# Altium PCB EasyEDA_ZX64_rev0.pcbdoc (part 1 of 3)
Units mil, origin at the board's own origin, x right, y up, seen from the top; angles counter-clockwise.
Board outline 12792.03 x 5307.23 mil, 2 copper layers (Top Layer, Bottom Layer); 152 components, 165 nets, 989 pads, 228 vias.
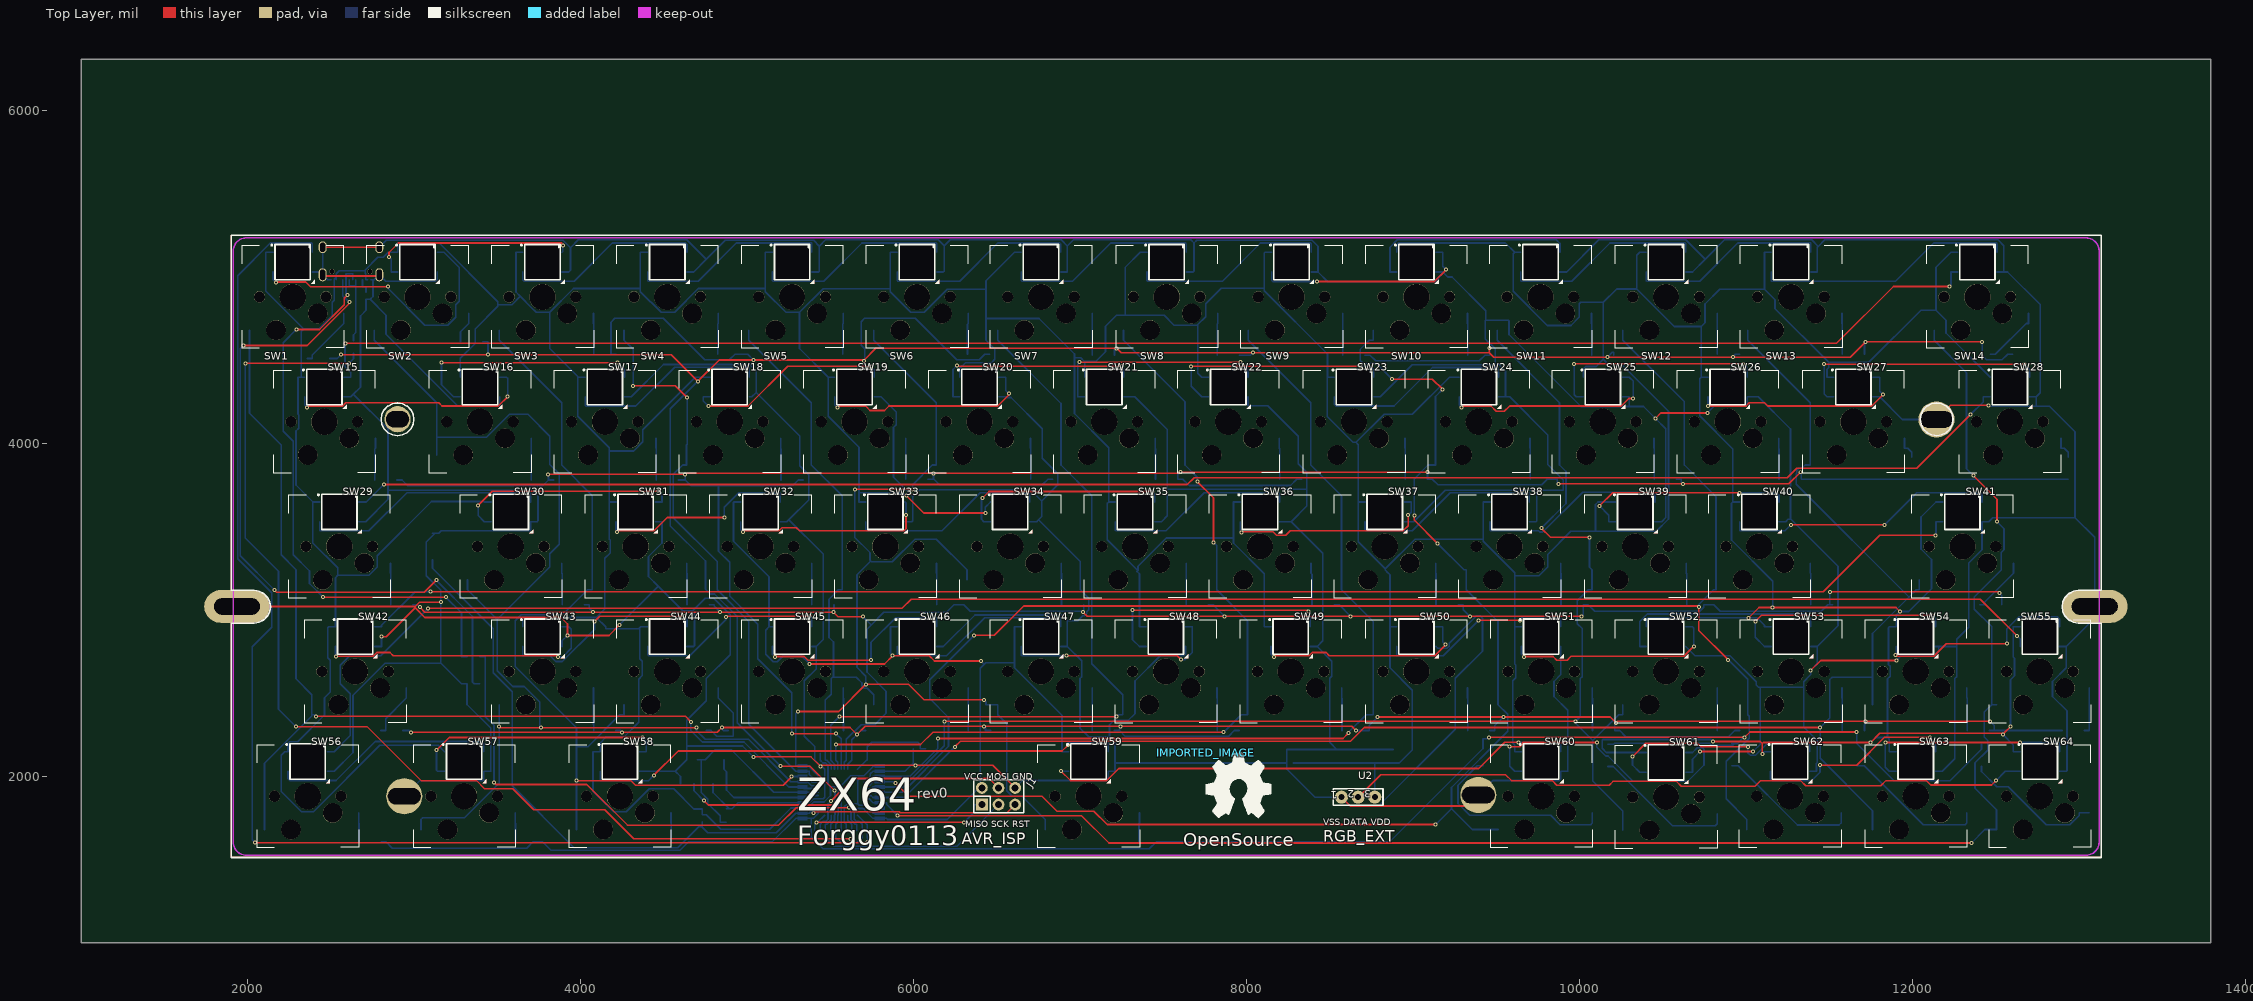
[diagram p0: Top Layer view]
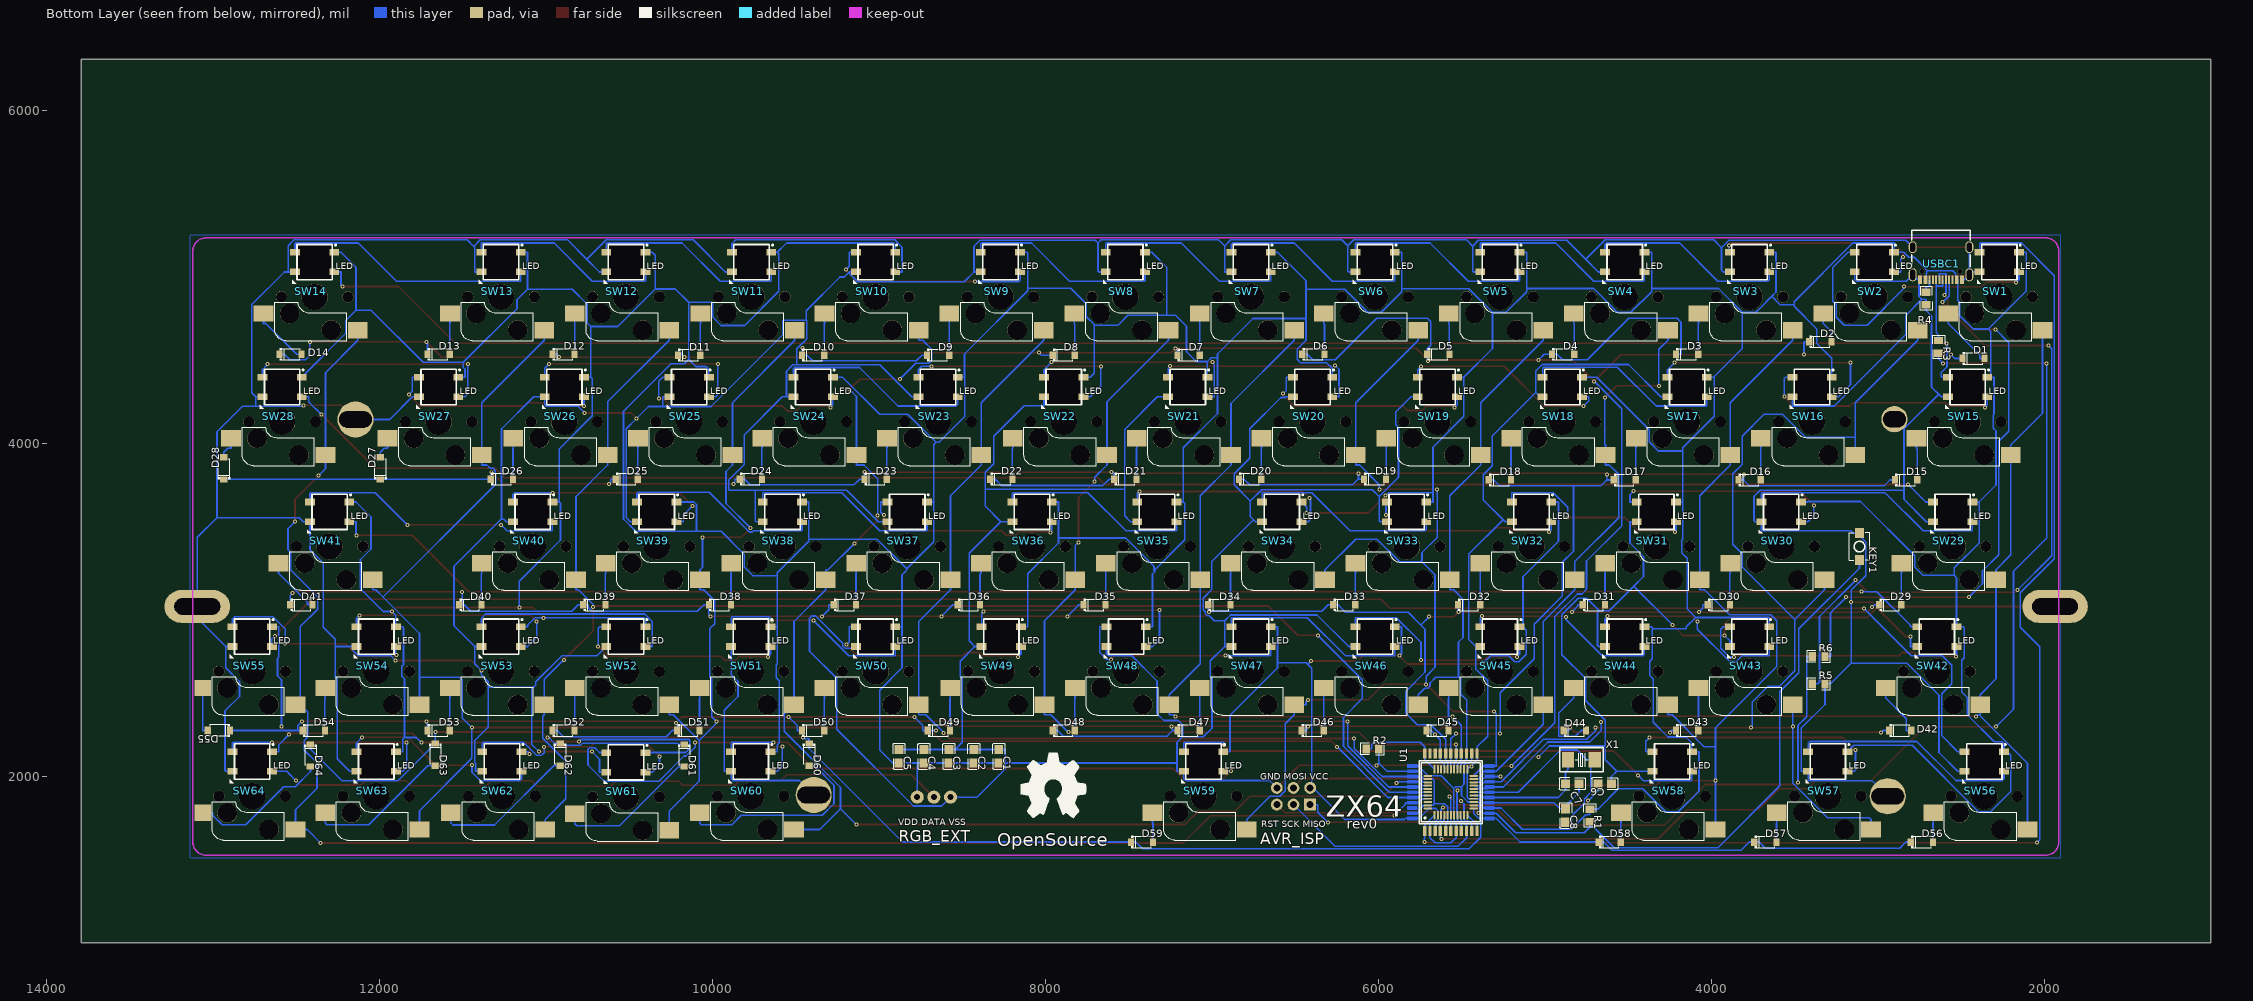
[diagram p1: Bottom Layer view, seen from below]

## Layer stack, top to bottom
Top Layer: signal copper (thickness not stored)
Dielectric: dielectric 12.6, FR-4, Dk 4.8
Bottom Layer: signal copper (thickness not stored)

## Board outline
13792.03,1000 1000,1000 1000,6307.23 13792.03,6307.23

## Components (designator, comment, footprint, x,y, rotation, side; value= is the part's Value field where it differs from the comment)
C1 "100uF" C0805 8280.18,2120 r90 bottom
C2 "100uF" C0805 8430.18,2120 r90 bottom
C3 "100uF" C0805 8580.18,2120 r90 bottom
C4 "100uF" C0805 8730.18,2120 r90 bottom
C5 "470uF" C0805 8880.18,2120 r90 bottom
C6 "1uF" C0805 4640.18,1955 r180 bottom
C7 "20pF" C0805 4835.18,1955 r180 bottom
C8 "20pF" C0805 4875.18,1765 r90 bottom
D1 "1N4148W-C84367" SOD-123_L2.8-W1.8-LS3.7-RD 2425.18,4510 r0 bottom
D2 "1N4148W-C84367" SOD-123_L2.8-W1.8-LS3.7-RD 3345.18,4610 r0 bottom
D3 "1N4148W-C84367" SOD-123_L2.8-W1.8-LS3.7-RD 4145.18,4535 r0 bottom
D4 "1N4148W-C84367" SOD-123_L2.8-W1.8-LS3.7-RD 4890.18,4535 r0 bottom
D5 "1N4148W-C84367" SOD-123_L2.8-W1.8-LS3.7-RD 5640.18,4535 r0 bottom
D6 "1N4148W-C84367" SOD-123_L2.8-W1.8-LS3.7-RD 6390.18,4535 r0 bottom
D7 "1N4148W-C84367" SOD-123_L2.8-W1.8-LS3.7-RD 7140.18,4530 r0 bottom
D8 "1N4148W-C84367" SOD-123_L2.8-W1.8-LS3.7-RD 7890.18,4530 r0 bottom
D9 "1N4148W-C84367" SOD-123_L2.8-W1.8-LS3.7-RD 8645.18,4530 r0 bottom
D10 "1N4148W-C84367" SOD-123_L2.8-W1.8-LS3.7-RD 9395.18,4530 r0 bottom
D11 "1N4148W-C84367" SOD-123_L2.8-W1.8-LS3.7-RD 10140.18,4530 r0 bottom
D12 "1N4148W-C84367" SOD-123_L2.8-W1.8-LS3.7-RD 10895.18,4535 r0 bottom
D13 "1N4148W-C84367" SOD-123_L2.8-W1.8-LS3.7-RD 11645.18,4535 r0 bottom
D14 "1N4148W-C84367" SOD-123_L2.8-W1.8-LS3.7-RD 12535.18,4535 r0 bottom
D15 "1N4148W-C84367" SOD-123_L2.8-W1.8-LS3.7-RD 2830.18,3780 r0 bottom
D16 "1N4148W-C84367" SOD-123_L2.8-W1.8-LS3.7-RD 3770.18,3780 r0 bottom
D17 "1N4148W-C84367" SOD-123_L2.8-W1.8-LS3.7-RD 4520.18,3780 r0 bottom
D18 "1N4148W-C84367" SOD-123_L2.8-W1.8-LS3.7-RD 5270.18,3780 r0 bottom
D19 "1N4148W-C84367" SOD-123_L2.8-W1.8-LS3.7-RD 6020.18,3785 r0 bottom
D20 "1N4148W-C84367" SOD-123_L2.8-W1.8-LS3.7-RD 6770.18,3785 r0 bottom
D21 "1N4148W-C84367" SOD-123_L2.8-W1.8-LS3.7-RD 7520.18,3785 r0 bottom
D22 "1N4148W-C84367" SOD-123_L2.8-W1.8-LS3.7-RD 8265.18,3785 r0 bottom
D23 "1N4148W-C84367" SOD-123_L2.8-W1.8-LS3.7-RD 9020.18,3785 r0 bottom
D24 "1N4148W-C84367" SOD-123_L2.8-W1.8-LS3.7-RD 9770.18,3785 r0 bottom
D25 "1N4148W-C84367" SOD-123_L2.8-W1.8-LS3.7-RD 10515.18,3785 r0 bottom
D26 "1N4148W-C84367" SOD-123_L2.8-W1.8-LS3.7-RD 11265.18,3785 r0 bottom
D27 "1N4148W-C84367" SOD-123_L2.8-W1.8-LS3.7-RD 11995.18,3850 r270 bottom
D28 "1N4148W-C84367" SOD-123_L2.8-W1.8-LS3.7-RD 12935.18,3850 r270 bottom
D29 "1N4148W-C84367" SOD-123_L2.8-W1.8-LS3.7-RD 2925.18,3030 r0 bottom
D30 "1N4148W-C84367" SOD-123_L2.8-W1.8-LS3.7-RD 3955.18,3030 r0 bottom
D31 "1N4148W-C84367" SOD-123_L2.8-W1.8-LS3.7-RD 4705.18,3030 r0 bottom
D32 "1N4148W-C84367" SOD-123_L2.8-W1.8-LS3.7-RD 5455.18,3030 r0 bottom
D33 "1N4148W-C84367" SOD-123_L2.8-W1.8-LS3.7-RD 6205.18,3030 r0 bottom
D34 "1N4148W-C84367" SOD-123_L2.8-W1.8-LS3.7-RD 6955.18,3030 r0 bottom
D35 "1N4148W-C84367" SOD-123_L2.8-W1.8-LS3.7-RD 7705.18,3030 r0 bottom
D36 "1N4148W-C84367" SOD-123_L2.8-W1.8-LS3.7-RD 8460.18,3030 r0 bottom
D37 "1N4148W-C84367" SOD-123_L2.8-W1.8-LS3.7-RD 9205.18,3030 r0 bottom
D38 "1N4148W-C84367" SOD-123_L2.8-W1.8-LS3.7-RD 9955.18,3030 r0 bottom
D39 "1N4148W-C84367" SOD-123_L2.8-W1.8-LS3.7-RD 10710.18,3030 r0 bottom
D40 "1N4148W-C84367" SOD-123_L2.8-W1.8-LS3.7-RD 11455.18,3030 r0 bottom
D41 "1N4148W-C84367" SOD-123_L2.8-W1.8-LS3.7-RD 12470.18,3030 r0 bottom
D42 "1N4148W-C84367" SOD-123_L2.8-W1.8-LS3.7-RD 2865.18,2275 r0 bottom
D43 "1N4148W-C84367" SOD-123_L2.8-W1.8-LS3.7-RD 4145.18,2275 r0 bottom
D44 "1N4148W-C84367" SOD-123_L2.8-W1.8-LS3.7-RD 4820.18,2275 r0 bottom
D45 "1N4148W-C84367" SOD-123_L2.8-W1.8-LS3.7-RD 5645.18,2275 r0 bottom
D46 "1N4148W-C84367" SOD-123_L2.8-W1.8-LS3.7-RD 6395.18,2275 r0 bottom
D47 "1N4148W-C84367" SOD-123_L2.8-W1.8-LS3.7-RD 7140.18,2275 r0 bottom
D48 "1N4148W-C84367" SOD-123_L2.8-W1.8-LS3.7-RD 7890.18,2275 r0 bottom
D49 "1N4148W-C84367" SOD-123_L2.8-W1.8-LS3.7-RD 8640.18,2275 r0 bottom
D50 "1N4148W-C84367" SOD-123_L2.8-W1.8-LS3.7-RD 9395.18,2275 r0 bottom
D51 "1N4148W-C84367" SOD-123_L2.8-W1.8-LS3.7-RD 10145.18,2275 r0 bottom
D52 "1N4148W-C84367" SOD-123_L2.8-W1.8-LS3.7-RD 10895.18,2275 r0 bottom
D53 "1N4148W-C84367" SOD-123_L2.8-W1.8-LS3.7-RD 11645.18,2275 r0 bottom
D54 "1N4148W-C84367" SOD-123_L2.8-W1.8-LS3.7-RD 12395.18,2275 r0 bottom
D55 "1N4148W-C84367" SOD-123_L2.8-W1.8-LS3.7-RD 12965.18,2275 r180 bottom
D56 "1N4148W-C84367" SOD-123_L2.8-W1.8-LS3.7-RD 2735.18,1605 r0 bottom
D57 "1N4148W-C84367" SOD-123_L2.8-W1.8-LS3.7-RD 3675.18,1605 r0 bottom
D58 "1N4148W-C84367" SOD-123_L2.8-W1.8-LS3.7-RD 4610.18,1605 r0 bottom
D59 "1N4148W-C84367" SOD-123_L2.8-W1.8-LS3.7-RD 7420.18,1605 r0 bottom
D60 "1N4148W-C84367" SOD-123_L2.8-W1.8-LS3.7-RD 9420.18,2130 r90 bottom
D61 "1N4148W-C84367" SOD-123_L2.8-W1.8-LS3.7-RD 10170.18,2125 r90 bottom
D62 "1N4148W-C84367" SOD-123_L2.8-W1.8-LS3.7-RD 10915.18,2130 r90 bottom
D63 "1N4148W-C84367" SOD-123_L2.8-W1.8-LS3.7-RD 11665.18,2130 r90 bottom
D64 "1N4148W-C84367" SOD-123_L2.8-W1.8-LS3.7-RD 12415.18,2125 r90 bottom
IMPORTED_IMAGE "IMPORTED_IMAGE" IMPORTED_IMAGE 7756.27,2141.86 r0 top
IMPORTED_IMAGE "IMPORTED_IMAGE" IMPORTED_IMAGE 7755.48,2141.86 r0 top
J1 "ISP разъем" HDR-TH_6P-P2.54-V-R2-C3-S2.54 6510.18,1880 r0 top
KEY1 "Switch3x4x2" SW-SMD_L4.0-W2.9-LS5.0 3110.18,3380 r90 bottom
R1 "10K" R0805 4730.18,1765 r90 bottom
R2 "10K" R0805 6035.18,2165 r0 bottom
R3 "22R" R0805 2635.18,4580 r90 bottom
R4 "5.1K" R0805 2710.18,4870 r270 bottom
R5 "5.1K" R0805 3355.18,2555 r0 bottom
R6 "22R" R0805 3355.18,2720 r0 bottom
SW1 "MX HOTSWAP 3228 TEST V1" "MX KAILH ROTATED"#1 2270.18,4880 r0 top
SW2 "MX HOTSWAP 3228 TEST V1" "MX KAILH ROTATED"#1 3020.18,4880 r0 top
SW3 "MX HOTSWAP 3228 TEST V1" "MX KAILH ROTATED"#1 3770.18,4880 r0 top
SW4 "MX HOTSWAP 3228 TEST V1" "MX KAILH ROTATED"#1 4520.18,4880 r0 top
SW5 "MX HOTSWAP 3228 TEST V1" "MX KAILH ROTATED"#1 5270.18,4880 r0 top
SW6 "MX HOTSWAP 3228 TEST V1" "MX KAILH ROTATED"#1 6020.18,4880 r0 top
SW7 "MX HOTSWAP 3228 TEST V1" "MX KAILH ROTATED"#1 6765.18,4880 r0 top
SW8 "MX HOTSWAP 3228 TEST V1" "MX KAILH ROTATED"#1 7520.18,4880 r0 top
SW9 "MX HOTSWAP 3228 TEST V1" "MX KAILH ROTATED"#1 8270.18,4880 r0 top
SW10 "MX HOTSWAP 3228 TEST V1" "MX KAILH ROTATED"#1 9020.18,4880 r0 top
SW11 "MX HOTSWAP 3228 TEST V1" "MX KAILH ROTATED"#1 9765.18,4880 r0 top
SW12 "MX HOTSWAP 3228 TEST V1" "MX KAILH ROTATED"#1 10520.18,4880 r0 top
SW13 "MX HOTSWAP 3228 TEST V1" "MX KAILH ROTATED"#1 11270.18,4880 r0 top
SW14 "MX HOTSWAP 3228 TEST V1" "MX KAILH ROTATED"#1 12390.18,4880 r0 top
SW15 "MX HOTSWAP 3228 TEST V1" "MX KAILH ROTATED"#1 2460.18,4130 r0 top
SW16 "MX HOTSWAP 3228 TEST V1" "MX KAILH ROTATED"#1 3395.18,4130 r0 top
SW17 "MX HOTSWAP 3228 TEST V1" "MX KAILH ROTATED"#1 4145.18,4130 r0 top
SW18 "MX HOTSWAP 3228 TEST V1" "MX KAILH ROTATED"#1 4895.18,4130 r0 top
SW19 "MX HOTSWAP 3228 TEST V1" "MX KAILH ROTATED"#1 5645.18,4130 r0 top
SW20 "MX HOTSWAP 3228 TEST V1" "MX KAILH ROTATED"#1 6395.18,4130 r0 top
SW21 "MX HOTSWAP 3228 TEST V1" "MX KAILH ROTATED"#1 7145.18,4130 r0 top
SW22 "MX HOTSWAP 3228 TEST V1" "MX KAILH ROTATED"#1 7890.18,4130 r0 top
SW23 "MX HOTSWAP 3228 TEST V1" "MX KAILH ROTATED"#1 8645.18,4130 r0 top
SW24 "MX HOTSWAP 3228 TEST V1" "MX KAILH ROTATED"#1 9395.18,4130 r0 top
SW25 "MX HOTSWAP 3228 TEST V1" "MX KAILH ROTATED"#1 10140.18,4130 r0 top
SW26 "MX HOTSWAP 3228 TEST V1" "MX KAILH ROTATED"#1 10890.18,4130 r0 top
SW27 "MX HOTSWAP 3228 TEST V1" "MX KAILH ROTATED"#1 11645.18,4130 r0 top
SW28 "MX HOTSWAP 3228 TEST V1" "MX KAILH ROTATED"#1 12585.18,4130 r0 top
SW29 "MX HOTSWAP 3228 TEST V1" "MX KAILH ROTATED"#1 2550.18,3380 r0 top
SW30 "MX HOTSWAP 3228 TEST V1" "MX KAILH ROTATED"#1 3580.18,3380 r0 top
SW31 "MX HOTSWAP 3228 TEST V1" "MX KAILH ROTATED"#1 4330.18,3380 r0 top
SW32 "MX HOTSWAP 3228 TEST V1" "MX KAILH ROTATED"#1 5080.18,3380 r0 top
SW33 "MX HOTSWAP 3228 TEST V1" "MX KAILH ROTATED"#1 5830.18,3380 r0 top
SW34 "MX HOTSWAP 3228 TEST V1" "MX KAILH ROTATED"#1 6580.18,3380 r0 top
SW35 "MX HOTSWAP 3228 TEST V1" "MX KAILH ROTATED"#1 7330.18,3380 r0 top
SW36 "MX HOTSWAP 3228 TEST V1" "MX KAILH ROTATED"#1 8080.18,3380 r0 top
SW37 "MX HOTSWAP 3228 TEST V1" "MX KAILH ROTATED"#1 8830.18,3380 r0 top
SW38 "MX HOTSWAP 3228 TEST V1" "MX KAILH ROTATED"#1 9580.18,3380 r0 top
SW39 "MX HOTSWAP 3228 TEST V1" "MX KAILH ROTATED"#1 10335.18,3380 r0 top
SW40 "MX HOTSWAP 3228 TEST V1" "MX KAILH ROTATED"#1 11080.18,3380 r0 top
SW41 "MX HOTSWAP 3228 TEST V1" "MX KAILH ROTATED"#1 12300.18,3380 r0 top
SW42 "MX HOTSWAP 3228 TEST V1" "MX KAILH ROTATED"#1 2645.18,2630 r0 top
SW43 "MX HOTSWAP 3228 TEST V1" "MX KAILH ROTATED"#1 3770.18,2630 r0 top
SW44 "MX HOTSWAP 3228 TEST V1" "MX KAILH ROTATED"#1 4520.18,2630 r0 top
SW45 "MX HOTSWAP 3228 TEST V1" "MX KAILH ROTATED"#1 5270.18,2630 r0 top
SW46 "MX HOTSWAP 3228 TEST V1" "MX KAILH ROTATED"#1 6020.18,2630 r0 top
SW47 "MX HOTSWAP 3228 TEST V1" "MX KAILH ROTATED"#1 6765.18,2630 r0 top
SW48 "MX HOTSWAP 3228 TEST V1" "MX KAILH ROTATED"#1 7515.18,2630 r0 top
SW49 "MX HOTSWAP 3228 TEST V1" "MX KAILH ROTATED"#1 8265.18,2630 r0 top
SW50 "MX HOTSWAP 3228 TEST V1" "MX KAILH ROTATED"#1 9020.18,2630 r0 top
SW51 "MX HOTSWAP 3228 TEST V1" "MX KAILH ROTATED"#1 9770.18,2630 r0 top
SW52 "MX HOTSWAP 3228 TEST V1" "MX KAILH ROTATED"#1 10520.18,2630 r0 top
SW53 "MX HOTSWAP 3228 TEST V1" "MX KAILH ROTATED"#1 11270.18,2630 r0 top
SW54 "MX HOTSWAP 3228 TEST V1" "MX KAILH ROTATED"#1 12020.18,2630 r0 top
SW55 "MX HOTSWAP 3228 TEST V1" "MX KAILH ROTATED"#2 12765.18,2630 r0 top
SW56 "MX HOTSWAP 3228 TEST V1" "MX KAILH ROTATED"#1 2360.18,1880 r0 top
SW57 "MX HOTSWAP 3228 TEST V1" "MX KAILH ROTATED"#1 3300.18,1880 r0 top
SW58 "MX HOTSWAP 3228 TEST V1" "MX KAILH ROTATED"#1 4235.18,1880 r0 top
SW59 "MX HOTSWAP 3228 TEST V1" "MX KAILH ROTATED"#1 7050.18,1880 r0 top
SW60 "MX HOTSWAP 3228 TEST V1" "MX KAILH ROTATED"#1 9770.18,1880 r0 top
SW61 "MX HOTSWAP 3228 TEST V1" "MX KAILH ROTATED"#1 10520.18,1875 r0 top
SW62 "MX HOTSWAP 3228 TEST V1" "MX KAILH ROTATED"#1 11265.18,1880 r0 top
SW63 "MX HOTSWAP 3228 TEST V1" "MX KAILH ROTATED"#1 12020.18,1880 r0 top
SW64 "MX HOTSWAP 3228 TEST V1" "MX KAILH ROTATED"#2 12765.18,1880 r0 top
U1 "atmega32u4-au&mu" ATMEGA32U4-AU&MU 5565.18,1905 r270 bottom
U2 "2.54_3PIN" "2.54 3PIN" 8720.18,1875 r0 top
USBC1 "TYPE-C-31-M-12" USB-C_SMD-TYPE-C-31-M-12 2620.18,5080 r180 bottom
X1 "16MHz" CRYSTAL-SMD_L5.0-W3.2-1 4780.18,2100 r0 bottom
? "" ? 1751.09,3380 r0 top
? "" ? 7515.33,5460.12 r0 top

## Footprints (in the part's own frame and the unit in brackets; to place one, negate y for a bottom-side part, rotate by r counter-clockwise, add the part's x,y. Pads: shape width x height; smd on the part's side, far side on the other; paste and mask are expansions set on the pad)
"2.54 3PIN" [mm]
  round 2 hole 0.914: 1(-3.81,0) 2(-1.27,0) 3(1.27,0)
  silkscreen extent -5.08,-1.27 2.54,1.27
ATMEGA32U4-AU&MU [mm]
  oval 1.3x0.3 smd: 1(3.513,-2.483) 2(3.513,-1.983) 3(3.513,-1.483) 4(3.513,-0.983) 5(3.513,-0.483) 6(3.513,0.017) 7(3.513,0.517) 8(3.513,1.017) 9(3.513,1.517) 10(3.513,2.017) 11(3.513,2.517) 23(-3.487,2.517) 24(-3.487,2.017) 25(-3.487,1.517) 26(-3.487,1.017) 27(-3.487,0.517) 28(-3.487,0.017) 29(-3.487,-0.483) 30(-3.487,-0.983) 31(-3.487,-1.483) 32(-3.487,-1.983) 33(-3.487,-2.483)
  rect 1.5x0.5 smd: 1(5.915,-3.985) 2(5.915,-3.185) 3(5.915,-2.385) 4(5.915,-1.585) 5(5.915,-0.785) 6(5.915,0.015) 7(5.915,0.815) 8(5.915,1.615) 9(5.915,2.415) 10(5.915,3.215) 11(5.915,4.015) 23(-5.885,4.015) 24(-5.885,3.215) 25(-5.885,2.415) 26(-5.885,1.615) 27(-5.885,0.815) 28(-5.885,0.015) 29(-5.885,-0.785) 30(-5.885,-1.585) 31(-5.885,-2.385) 32(-5.885,-3.185) 33(-5.885,-3.985)
  oval 0.3x1.3 smd: 12(2.513,3.517) 13(2.013,3.517) 14(1.513,3.517) 15(1.013,3.517) 16(0.513,3.517) 17(0.013,3.517) 18(-0.487,3.517) 19(-0.987,3.517) 20(-1.487,3.517) 21(-1.987,3.517) 22(-2.487,3.517) 34(-2.487,-3.483) 35(-1.987,-3.483) 36(-1.487,-3.483) 37(-0.987,-3.483) 38(-0.487,-3.483) 39(0.013,-3.483) 40(0.513,-3.483) 41(1.013,-3.483) 42(1.513,-3.483) 43(2.013,-3.483) 44(2.513,-3.483)
  round 0 smd: 12(4.015,5.915) 13(3.215,5.915) 14(2.415,5.915) 15(1.615,5.915) 16(0.815,5.915) 17(0.015,5.915) 18(-0.785,5.915) 19(-1.585,5.915) 20(-2.385,5.915) 21(-3.185,5.915) 22(-3.985,5.915) 34(-3.985,-5.885) 35(-3.185,-5.885) 36(-2.385,-5.885) 37(-1.585,-5.885) 38(-0.785,-5.885) 39(0.015,-5.885) 40(0.815,-5.885) 41(1.615,-5.885) 42(2.415,-5.885) 43(3.215,-5.885) 44(4.015,-5.885)
  Top Layer region: 4.265,5.165 3.765,5.165 3.765,6.665 4.265,6.665
  Top Layer region: 3.465,5.165 2.965,5.165 2.965,6.665 3.465,6.665
  Top Layer region: 2.665,5.165 2.165,5.165 2.165,6.665 2.665,6.665
  Top Layer region: 1.865,5.165 1.365,5.165 1.365,6.665 1.865,6.665
  Top Layer region: 1.065,5.165 0.565,5.165 0.565,6.665 1.065,6.665
  Top Layer region: 0.265,5.165 -0.235,5.165 -0.235,6.665 0.265,6.665
  Top Layer region: -0.535,5.165 -1.035,5.165 -1.035,6.665 -0.535,6.665
  Top Layer region: -1.335,5.165 -1.835,5.165 -1.835,6.665 -1.335,6.665
  Top Layer region: -2.135,5.165 -2.635,5.165 -2.635,6.665 -2.135,6.665
  Top Layer region: -2.935,5.165 -3.435,5.165 -3.435,6.665 -2.935,6.665
  Top Layer region: -3.735,5.165 -4.235,5.165 -4.235,6.665 -3.735,6.665
  Top Layer region: -3.735,-6.635 -4.235,-6.635 -4.235,-5.135 -3.735,-5.135
  Top Layer region: -2.935,-6.635 -3.435,-6.635 -3.435,-5.135 -2.935,-5.135
  Top Layer region: -2.135,-6.635 -2.635,-6.635 -2.635,-5.135 -2.135,-5.135
  Top Layer region: -1.335,-6.635 -1.835,-6.635 -1.835,-5.135 -1.335,-5.135
  Top Layer region: -0.535,-6.635 -1.035,-6.635 -1.035,-5.135 -0.535,-5.135
  Top Layer region: 0.265,-6.635 -0.235,-6.635 -0.235,-5.135 0.265,-5.135
  Top Layer region: 1.065,-6.635 0.565,-6.635 0.565,-5.135 1.065,-5.135
  Top Layer region: 1.865,-6.635 1.365,-6.635 1.365,-5.135 1.865,-5.135
  Top Layer region: 2.665,-6.635 2.165,-6.635 2.165,-5.135 2.665,-5.135
  Top Layer region: 3.465,-6.635 2.965,-6.635 2.965,-5.135 3.465,-5.135
  Top Layer region: 4.265,-6.635 3.765,-6.635 3.765,-5.135 4.265,-5.135
  silkscreen extent -4.78,-4.78 4.82,4.82
C0805 [mm]
  rect 1.41x1.35 smd: 1(1.03,0) 2(-1.03,0)
  silkscreen extent -1.96,-0.9 1.96,0.9
CRYSTAL-SMD_L5.0-W3.2-1 [mm]
  rect 1.9x2.4 smd: 1(2.05,0) 2(-2.05,0)
  silkscreen extent -3.33,-1.85 3.32,1.85
HDR-TH_6P-P2.54-V-R2-C3-S2.54 [mm]
  rect 1.8x1.8 hole 1.05: 1(-2.54,-1.27)
  round 1.8 hole 1.05: 2(-2.54,1.27) 3(0,-1.27) 4(0,1.27) 5(2.54,-1.27) 6(2.54,1.27)
  silkscreen extent -3.81,-2.54 3.81,2.54
IMPORTED_IMAGE [mil]
"MX KAILH ROTATED"#1 [mm]
  rect 3x2.5 smd far side: 1(-6.599,-5.08) 2(7.8,-2.54)
  rect 1.5x1 smd far side: 3(-3,6.8) 4(-3,3.8) 5(3,3.8) 6(3,6.8)
  round 1.702 hole 1.702 unplated: ""(-5.08,0) ""(5.08,0)
  round 3 hole 3 unplated: ""(-2.54,-5.08) ""(3.81,-2.54)
  round 3.988 hole 3.988 unplated: ""(0,0)
  Top Layer region: 2.8,2 3.4,2 3.4,2.6
  Multi-Layer board cut-out: -2.627,7.927 -2.627,2.673 2.627,2.673 2.627,7.927
  silkscreen extent -7.8,-7.8 7.8,8
"MX KAILH ROTATED"#2 [mm]
  rect 3x2.5 smd far side: 1(-6.599,-5.08)
  rect 2.5x2.5 smd far side: 2(7.543,-2.54)
  rect 1.5x1 smd far side: 3(-3,6.8) 4(-3,3.8) 5(3,3.8) 6(3,6.8)
  round 1.702 hole 1.702 unplated: ""(-5.08,0) ""(5.08,0)
  round 3 hole 3 unplated: ""(-2.54,-5.08) ""(3.81,-2.54)
  round 3.988 hole 3.988 unplated: ""(0,0)
  Top Layer region: 2.8,2 3.4,2 3.4,2.6
  Multi-Layer board cut-out: -2.627,7.927 -2.627,2.673 2.627,2.673 2.627,7.927
  silkscreen extent -7.8,-7.8 7.8,8
R0805 [mil]
  rect 44.59x54.21 smd: 1(38.04,0) 2(-38.04,0)
  silkscreen extent -69,-36 69,36
SOD-123_L2.8-W1.8-LS3.7-RD [mm]
  rect 0.95x1.15 smd: 1(1.693,0) 2(-1.693,0)
  silkscreen extent -1.41,-0.94 1.63,0.94
SW-SMD_L4.0-W2.9-LS5.0 [mm]
  rect 1.53x1.36 smd: 1(2.035,0) 2(-2.035,0)
  silkscreen extent -2.08,-1.58 2.08,1.58
USB-C_SMD-TYPE-C-31-M-12 [mm]
  oval 1.2x2 hole 0.8 slot 1.6 at 90 deg: 0(-4.325,-1.716) 0(4.325,-1.716)
  oval 1.2x1.8 hole 0.8 slot 1.4 at 90 deg: 0(-4.325,2.484) 0(4.325,2.484)
  rect 0.3x1.3 smd: A1(3.35,-2.484) A4(2.55,-2.484) A5(1.25,-2.484) A6(0.25,-2.484) A7(-0.25,-2.484) A8(-1.25,-2.484) A9(-2.55,-2.484) A12(-3.35,-2.484) B1(-3.05,-2.484) B4(-2.25,-2.484) B5(-1.75,-2.484) B6(-0.75,-2.484) B7(0.75,-2.484) B8(1.75,-2.484) B9(2.25,-2.484) B12(3.05,-2.484)
  round 0.75 hole 0.75 unplated: ""(-2.9,-1.216) ""(2.9,-1.216)
  silkscreen extent -4.47,-0.5 4.47,5.08
? [mil]

## Free pads (board coordinates)
  oval 393.7x196.85 hole 98.42 slot 275.59 at 0 deg: 1(1935.18,3020) 1(13095.18,3020)
  round 157.48 hole 98.42 slot 137.8 at 0 deg: 1(2900.18,4145)
  round 216.53 hole 98.42 slot 196.85 at 0 deg: 1(2940.28,1880) 1(9392.04,1887.88) 1(12144.98,4143.7)

## Via types
v1: diameter 24.02, hole 12.01, Top Layer to Bottom Layer, tented both sides, 228 vias

## Nets (pads, with @x,y where several pads share a name; then routed paths per layer and width w, separated by ;. In a path a pad name is that pad's centre, name@x,y a point inside that pad or via, vN(x,y) a via of type N, cw(c..) or ccw(c..) an arc to the next point about the centre after c; other vN are vias at no path point)
"\"\"D-\"\"":  | length 20.3
  Bottom Layer w10: 5659.07,1672.12 5659.07,1692.42
"\"D+\"": R3.2 U1.4 | length 6768.1
  Top Layer w10: v1(1986.03,4480.24) v1(2608.11,4480.24) ; v1(2288.69,2298.54) 2716.94,2298.54 3041.32,1974.16 3373.72,1974.16 3422.46,1925.42 3592.33,1925.42 3718.72,1799.03 4143.94,1799.03 4318.51,1624.46 v1(5619.46,1624.46)
  Bottom Layer w10: v1(1986.03,4480.24) 1986.03,3430.83 2184.3,3232.56 2184.3,2402.93 v1(2288.69,2298.54) ; v1(2608.11,4480.24) 2635.18,4507.31 R3.2@2635.18,4541.96 ; U1.4@5603.88,1766.7 5603.88,1736.42 5627.58,1712.72 U1.4@5627.58,1672.12 5627.58,1651.83 5627.58,1631.53 5626.53,1631.53 v1(5619.46,1624.46)
"\"D-\"": R6.1 U1.3 | length 3238.2
  Top Layer w10: v1(3479.09,1963.8) 3491.77,1951.12 4037.38,1951.12 4281.66,1706.84 5190.15,1706.84 5294.78,1811.47 v1(5612.99,1811.47)
  Bottom Layer w10: R6.1@3393.22,2720 3426.59,2720 3426.59,2358.24 3479.09,2305.74 v1(3479.09,1963.8) ; v1(5612.99,1811.47) 5623.56,1800.9 U1.3@5623.56,1766.7 ; U1.3@5623.56,1766.7 5623.58,1739.5 5629.08,1733.9 5650.38,1712.7 5659.08,1712.7 ; U1.3@5659.07,1692.42 5659.07,1712.72
COL0: SW1.1 SW15.1 SW29.1 SW42.1 SW56.1 U1.18 | length 6530.3
  Top Layer w10: v1(2409.69,2359.79) 4629.83,2359.79 v1(4662.03,2327.59)
  Bottom Layer w10: SW1.1@2010.38,4680 2010.38,4180.24 2200.38,3990.24 SW15.1@2200.38,3930 2200.38,3330.24 2290.38,3240.24 SW29.1@2290.38,3180 2290.38,2585.24 2385.38,2490.24 SW42.1@2385.38,2430 2385.38,2384.1 2385.38,2369.76 ; SW56.1@2100.38,1680 2100.38,2077.61 2385.38,2362.61 2385.38,2369.76 ; v1(2409.69,2359.79) 2399.72,2369.76 2385.38,2369.76 ; v1(4662.03,2327.59) 4662.03,2274.62 4731.18,2205.47 4981.24,2205.47 5250.81,1935.9 U1.18@5332.3,1935.9 5341.31,1926.89 5424,1926.89 U1.18@5426.71,1924.18
COL1: SW2.1 SW16.1 SW30.1 SW43.1 SW57.1 U1.19 | length 7251.2
  Top Layer w10: v1(3510.38,2298.15) 3516.72,2291.81 v1(3760.69,2291.81) v1(4696.27,2291.81)
  Bottom Layer w10: SW2.1@2760.38,4680 2760.38,4619.76 3135.38,4244.76 3135.38,4037.18 ; SW57.1@3040.38,1680 3040.38,1740.24 3051.84,1751.7 3302.05,1751.7 3510.38,1960.03 v1(3510.38,2298.15) SW43.1@3510.38,2430 ; SW16.1@3135.38,3930 3135.38,4037.18 ; SW30.1@3320.38,3180 3320.38,3119.76 3498.15,2942 ; v1(3760.69,2291.81) 3754.35,2298.15 3754.35,2445.85 3660.85,2539.35 3592.17,2539.35 3498.15,2633.37 3498.15,2941.99 ; v1(4696.27,2291.81) 4696.27,2273.65 4748.39,2221.53 5007.97,2221.53 5262.1,1967.4 U1.19@5332.3,1967.4 5362.55,1967.4 5386.09,1943.86 U1.19@5426.71,1943.86 ; 3135.38,4037.18 3434.63,4037.18 3572.73,4175.28 3683.2,4175.28 3815.06,4043.42 3815.06,3873.13 3870.53,3817.66 3870.53,3394.32 3813.46,3337.25 3813.46,3257.31 3498.15,2942
COL2: SW3.1 SW17.1 SW31.1 SW44.1 SW58.1 U1.20 | length 5663.4
  Top Layer w10: v1(3975.38,1974.2) 4300.88,1974.18 4329.1,1945.96 5215.97,1945.96 v1(5267.35,1997.34)
  Bottom Layer w10: SW3.1@3510.38,4680 3510.38,4619.76 3885.38,4244.76 SW17.1@3885.38,3930 3885.38,3899.88 3885.38,3869.76 4070.38,3684.76 SW31.1@4070.38,3180 4070.38,3119.76 4040.66,3119.76 3891.11,2970.21 3642.51,2970.21 3607.43,2935.13 3607.43,2659.16 3975.38,2291.21 3975.38,2178.03 ; SW58.1@3975.38,1680 3975.38,1740.24 v1(3975.38,1974.2) 3975.38,2178.03 ; SW44.1@4260.38,2430 4260.38,2369.76 4235.39,2369.76 4043.66,2178.03 3975.38,2178.03 ; v1(5267.35,1997.34) 5268.9,1998.89 U1.20@5332.3,1998.89 5356.43,1998.89 5391.77,1963.55 U1.20@5426.71,1963.55
COL3: SW4.1 SW18.1 SW32.1 SW45.1 U1.21 | length 3473.2
  Top Layer w10: v1(4315.14,4345.23) 4568.91,4345.23 v1(4639.97,4274.17)
  Bottom Layer w10: SW4.1@4260.38,4680 4260.38,4619.76 4315.14,4565 v1(4315.14,4345.23) ; v1(4639.97,4274.17) 4639.97,3994.83 4635.38,3990.24 SW18.1@4635.38,3930 4635.38,3869.76 4612.79,3869.76 4557.05,3814.02 4557.05,3553.81 4820.38,3290.48 SW32.1@4820.38,3180 4820.38,3149.88 4820.38,3119.76 5010.38,2929.76 SW45.1@5010.38,2430 5010.38,2311.8 5291.79,2030.39 U1.21@5332.3,2030.39 5352.56,2030.39 5372.82,2030.39 5372.89,2030.32 5372.89,2010.9 5400.56,1983.23 U1.21@5426.71,1983.23
COL4: SW5.1 SW19.1 SW33.1 SW46.1 U1.25 | length 3325.7
  Bottom Layer w10: SW5.1@5010.38,4680 5010.38,4619.76 5385.38,4244.76 SW19.1@5385.38,3930 5385.38,3899.88 5385.38,3869.76 5570.38,3684.76 SW33.1@5570.38,3180 5570.38,3119.76 5547.79,3119.76 5492.05,3064.02 5492.05,2833.58 5518.82,2806.81 5518.82,2595.21 ; U1.25@5505.45,2042.29 5505.45,2069.61 5478.88,2096.18 5470.1,2096.18 U1.25@5470.1,2136.69 5470.1,2458.48 5504.4,2492.78 5504.4,2587.18 5512.43,2595.21 5518.82,2595.21 ; SW46.1@5760.38,2430 5760.38,2490.24 5721.31,2529.31 5703.82,2529.31 5690.31,2542.82 5690.31,2560.31 5655.41,2595.21 5518.82,2595.21
COL5: SW6.1 SW20.1 SW34.1 SW47.1 SW59.1 U1.22 | length 6296.6
  Top Layer w10: v1@5306.19,2389.65 5550.65,2389.65 v1(5713.37,2552.37) 5969.36,2552.37 6062.15,2459.58 v1(6424.17,2459.58) ; v1@5647.25,3723.3 v1(5994.76,3723.3)
  Bottom Layer w10: v1@5306.19,2389.65 5291.79,2375.25 5291.79,2061.89 U1.22@5332.3,2061.89 5372.82,2061.89 5372.82,2056.81 U1.22@5426.71,2002.92 ; v1@5647.25,3723.3 5647.25,3434.87 5738.3,3343.82 5738.3,3298.45 5743.2,3293.56 ; v1(5713.37,2552.37) 5713.37,2601.5 5659.68,2655.19 5659.68,3210.04 5743.2,3293.56 ; SW6.1@5760.38,4680 5760.38,4619.76 6135.38,4244.76 SW20.1@6135.38,3930 6135.38,3869.76 6112.79,3869.76 5994.76,3751.73 v1(5994.76,3723.3) ; SW34.1@6320.38,3180 6320.38,3240.24 6136.06,3424.56 6007.85,3424.56 5871.95,3288.66 5748.09,3288.66 5743.2,3293.56 ; v1(6424.17,2459.58) 6435.34,2448.41 6435.34,2430 SW47.1@6505.38,2430 6505.38,2369.76 6560.21,2314.93 6560.21,1912.64 6592.87,1879.98 6650.64,1879.98 6790.38,1740.24 SW59.1@6790.38,1680
  other v1: 5306.19,2389.65 5647.25,3723.3
COL6: SW7.1 SW21.1 SW35.1 SW48.1 U1.26 | length 4674.6
  Top Layer w10: v1(5553.54,2357.98) v1(7218.32,2357.98)
  Bottom Layer w10: U1.26@5525.14,2042.29 5525.14,2072.63 5501.59,2096.18 5501.59,2116.44 U1.26@5501.59,2136.69 5501.59,2177.21 5501.59,2306.03 v1(5553.54,2357.98) ; SW7.1@6505.38,4680 6505.38,4619.76 6885.38,4239.76 SW21.1@6885.38,3930 6885.38,3869.76 7070.38,3684.76 SW35.1@7070.38,3180 7070.38,3149.88 7070.38,3119.76 7070.38,2675.24 7255.38,2490.24 SW48.1@7255.38,2430 7255.38,2369.76 7230.1,2369.76 v1(7218.32,2357.98)
COL7: SW8.1 SW22.1 SW36.1 SW49.1 U1.27 | length 5318.5
  Top Layer w10: v1(5533.09,2190.54) 6041.58,2190.54 6116.2,2265.16 v1(7862.94,2265.16) ; v1(7704.43,3769.5) 7801.47,3672.46 v1(7801.47,3405.75)
  Bottom Layer w10: v1(5533.09,2190.54) U1.27@5533.09,2136.69 5533.09,2116.44 5533.09,2096.18 5544.82,2084.45 U1.27@5544.82,2042.29 ; SW8.1@7260.38,4680 7260.38,4619.76 7630.38,4249.76 SW22.1@7630.38,3930 7630.38,3899.88 7630.38,3869.76 7704.43,3795.71 v1(7704.43,3769.5) ; v1(7801.47,3405.75) 7820.38,3386.84 SW36.1@7820.38,3180 7820.38,3154.36 7820.38,3119.76 8005.38,2934.76 8005.38,2490.24 SW49.1@8005.38,2430 8005.38,2369.76 7967.54,2369.76 v1(7862.94,2265.16)
COL8: SW9.1 SW23.1 SW37.1 SW50.1 U1.36 | length 5890
  Top Layer w10: v1(6145.1,2226.99) 8579.5,2226.99 v1(8611.66,2259.15)
  Bottom Layer w10: U1.36@5702.3,1963.55 5729.79,1963.55 5756.35,1990.11 5756.35,1998.89 5776.61,1998.89 U1.36@5796.87,1998.89 5977.22,1998.89 6145.1,2166.77 v1(6145.1,2226.99) ; SW9.1@8010.38,4680 8010.38,4619.76 8385.38,4244.76 SW23.1@8385.38,3930 8385.38,3899.88 8385.38,3869.76 8570.38,3684.76 SW37.1@8570.38,3180 8570.38,3119.76 8760.38,2929.76 SW50.1@8760.38,2430 8760.38,2400.57 8760.38,2369.76 8718.26,2369.76 8611.66,2263.16 v1(8611.66,2259.15)
COL9: SW10.1 SW24.1 SW38.1 SW51.1 SW60.1 U1.37 | length 7807.1
  Top Layer w10: v1@5890.03,1960.05 5970.08,1880 6771.54,1880 6861.1,1790.44 7082.41,1790.44 7162.98,1709.87 v1@9136.25,1709.87 ; v1(8874.38,4385.94) 9116.23,4385.94 v1(9177.96,4324.21) ; v1@9008.42,3567.05 9008.42,3537.65 v1(9146.21,3399.86)
  Bottom Layer w10: U1.37@5702.3,1943.86 5732.81,1943.86 5756.35,1967.4 5776.61,1967.4 U1.37@5796.87,1967.4 5882.68,1967.4 v1@5890.03,1960.05 ; SW10.1@8760.38,4680 8760.38,4619.76 8737.79,4619.76 8682.05,4564.02 8682.05,4499.21 8701.02,4480.24 8780.08,4480.24 v1(8874.38,4385.94) ; v1@9008.42,3567.05 9008.42,3787.98 9090.2,3869.76 9135.38,3869.76 SW24.1@9135.38,3930 9135.38,4281.63 v1(9177.96,4324.21) ; v1@9136.25,1709.87 9230.75,1804.37 ; v1(9146.21,3399.86) 9305.83,3240.24 9320.38,3240.24 SW38.1@9320.38,3180 9320.38,3149.88 9320.38,3119.76 9510.38,2929.76 SW51.1@9510.38,2430 9568.68,2371.7 9568.68,2270.63 9230.75,1932.7 9230.75,1804.37 ; SW60.1@9510.38,1680 9440.34,1680 9355.12,1680 9230.75,1804.37
  other v1: 9136.25,1709.87 5890.03,1960.05 9008.42,3567.05
COL10: SW11.1 SW25.1 SW39.1 SW52.1 SW61.1 U1.38 | length 8531.2
  Top Layer w10: v1(6184.48,2330.21) v1(9977.41,2330.21) ; v1(9770.63,3490.12) 9825.74,3435.01 v1(10060.44,3435.01)
  Bottom Layer w10: U1.38@5702.3,1924.18 5744.63,1924.18 5756.35,1935.9 U1.38@5796.87,1935.9 5937.8,1935.9 6184.48,2182.58 v1(6184.48,2330.21) ; SW11.1@9505.38,4680 9505.38,4619.76 9880.38,4244.76 SW25.1@9880.38,3930 9880.38,3869.76 9919.11,3831.03 9919.11,3638.6 v1(9770.63,3490.12) ; v1(10060.44,3435.01) 10060.44,3255.18 10075.38,3240.24 SW39.1@10075.38,3180 10075.38,3119.76 10052.79,3119.76 9987.47,3054.44 9987.47,2915.94 10015.87,2887.54 10015.87,2598.65 10004.4,2587.18 10004.4,2357.2 v1(9977.41,2330.21) 9977.41,2316.76 10079.68,2214.49 ; SW61.1@10260.38,1675 10260.38,1791.5 10079.68,1972.2 10079.68,2214.49 ; SW52.1@10260.38,2430 10260.38,2369.76 10234.95,2369.76 10079.68,2214.49
COL11: SW12.1 SW26.1 SW40.1 SW53.1 SW62.1 U1.39 | length 9394
  Top Layer w10: v1(6363.87,2846.77) 6484.33,2846.77 6660.72,3023.16 10711.59,3023.16 10717.3,3017.45 10717.3,2875.57 v1(10893.44,2699.43)
  Bottom Layer w10: U1.39@5702.3,1904.49 5702.38,1904.41 U1.39@5796.87,1904.41 5934.93,1904.41 6210.05,2179.53 6210.05,2353.63 6096.24,2467.44 6096.24,2579.14 v1(6363.87,2846.77) ; SW12.1@10260.38,4680 10260.38,4619.76 10630.38,4249.76 SW26.1@10630.38,3930 10630.38,3869.76 10820.38,3679.76 SW40.1@10820.38,3180 10820.38,3149.88 10820.38,3119.76 10804.74,3119.76 10717.3,3032.32 v1@10717.3,3017.45 ; v1(10893.44,2699.43) 11010.38,2582.49 SW53.1@11010.38,2430 11010.38,2369.76 11019.9,2360.24 11019.9,2228.98 10881.01,2090.09 10881.01,1864.61 11005.38,1740.24 SW62.1@11005.38,1680
  other v1: 10717.3,3017.45
COL12: SW13.1 SW27.1 SW41.1 SW54.1 SW63.1 U1.40 | length 10217.6
  Top Layer w10: v1(6247.48,2176.63) 6281.78,2210.93 8624.66,2210.93 8706.46,2292.73 v1(11445.87,2292.73)
  Bottom Layer w10: U1.40@5702.3,1884.81 5744.45,1884.81 5756.35,1872.91 U1.40@5796.87,1872.91 5943.76,1872.91 v1(6247.48,2176.63) ; SW13.1@11010.38,4680 11010.38,4619.76 11385.38,4244.76 SW27.1@11385.38,3930 11385.38,3869.76 11355.26,3869.76 11334.96,3849.46 11317.98,3849.46 11304.47,3835.95 11304.47,3818.97 11302.05,3816.55 11302.05,3754.92 11979.95,3077.03 ; SW63.1@11760.38,1680 11760.38,1793.38 11445.87,2107.89 v1(11445.87,2292.73) 11504.41,2351.27 11504.41,2581.06 11519.23,2595.88 11760.38,2595.88 ; SW54.1@11760.38,2430 11760.38,2595.88 ; SW41.1@12040.38,3180 12040.38,3119.76 12022.68,3119.76 11979.95,3077.03 ; 11760.38,2595.88 11760.38,2857.46 11979.95,3077.03
COL13: SW14.1 SW28.1 SW55.1 SW64.1 U1.41 | length 10385
  Top Layer w10: v1@5904.63,1763.85 7008.92,1763.85 7173.59,1599.18 v1(12354.52,1599.18) ; v1(12365.47,3807.32) 12508.2,3664.59 v1@12508.2,3529.85
  Bottom Layer w10: U1.41@5702.3,1865.12 5732.64,1865.12 5756.35,1841.41 5776.61,1841.41 U1.41@5796.87,1841.41 5837.39,1841.41 5837.39,1831.09 v1@5904.63,1763.85 ; SW14.1@12130.38,4680 12130.38,4619.76 12325.33,4424.81 12325.33,3990.29 12325.38,3990.24 SW28.1@12325.38,3930 12325.38,3847.41 v1(12365.47,3807.32) ; v1(12354.52,1599.18) 12435.34,1680 SW64.1@12505.38,1680 12505.38,1798.38 12376.12,1927.64 12376.12,2081.14 12452.26,2157.28 12452.26,2215.37 12432.06,2235.57 12432.06,2386.11 SW55.1@12475.95,2430 ; SW55.1@12505.38,2430 SW55.1@12475.95,2430 ; v1@12508.2,3529.85 12550.51,3487.54 12550.51,3360.99 12534.66,3345.14 12534.66,3240.26 12371.76,3077.36 12371.76,3004.31 12475.95,2900.12 SW55.1@12475.95,2430
  other v1: 5904.63,1763.85 12508.2,3529.85
D1_2: D1.2 SW1.2 | length 378
  Bottom Layer w10: D1.2@2358.55,4510 2388.24,4510 2388.24,4530.72 2577.28,4719.76 SW1.2@2577.28,4780
D2_2: D2.2 SW2.2 | length 190.2
  Bottom Layer w10: D2.2@3278.55,4610 3278.55,4671.03 3327.28,4719.76 SW2.2@3327.28,4780
D3_2: D3.2 SW3.2 | length 245.5
  Bottom Layer w10: SW3.2@4077.28,4780 4077.28,4719.76 4078.55,4718.49 D3.2@4078.55,4535
D4_2: D4.2 SW4.2 | length 246.5
  Bottom Layer w10: D4.2@4823.55,4535 4823.55,4716.03 4827.28,4719.76 SW4.2@4827.28,4780
D5_2: D5.2 SW5.2 | length 246.5
  Bottom Layer w10: D5.2@5573.55,4535 5573.55,4716.03 5577.28,4719.76 SW5.2@5577.28,4780
D6_2: D6.2 SW6.2 | length 246.5
  Bottom Layer w10: D6.2@6323.55,4535 6323.55,4716.03 6327.28,4719.76 SW6.2@6327.28,4780
D7_2: D7.2 SW7.2 | length 250.5
  Bottom Layer w10: SW7.2@7072.28,4780 7072.28,4719.76 7073.55,4718.49 D7.2@7073.55,4530
D8_2: D8.2 SW8.2 | length 251.5
  Bottom Layer w10: D8.2@7823.55,4530 7823.55,4716.03 7827.28,4719.76 SW8.2@7827.28,4780
D9_2: D9.2 SW9.2 | length 250.5
  Bottom Layer w10: SW9.2@8577.28,4780 8577.28,4719.76 8578.55,4718.49 D9.2@8578.55,4530
D10_2: D10.2 SW10.2 | length 250.5
  Bottom Layer w10: SW10.2@9327.28,4780 9327.28,4719.76 9328.55,4718.49 D10.2@9328.55,4530
D11_2: D11.2 SW11.2 | length 250.5
  Bottom Layer w10: SW11.2@10072.28,4780 10072.28,4719.76 10073.55,4718.49 D11.2@10073.55,4530
D12_2: D12.2 SW12.2 | length 245.5
  Bottom Layer w10: SW12.2@10827.28,4780 10827.28,4719.76 10828.55,4718.49 D12.2@10828.55,4535
D13_2: D13.2 SW13.2 | length 245.5
  Bottom Layer w10: SW13.2@11577.28,4780 11577.28,4719.76 11578.55,4718.49 D13.2@11578.55,4535
D14_2: D14.2 SW14.2 | length 365.5
  Bottom Layer w10: D14.2@12468.55,4535 12498.24,4535 12683,4719.76 12697.28,4719.76 SW14.2@12697.28,4780
D15_2: D15.2 SW15.2 | length 251.5
  Bottom Layer w10: D15.2@2763.55,3780 2763.55,3966.03 2767.28,3969.76 SW15.2@2767.28,4030
D16_2: D16.2 SW16.2 | length 250.5
  Bottom Layer w10: SW16.2@3702.28,4030 3702.28,3969.76 3703.55,3968.49 D16.2@3703.55,3780
D17_2: D17.2 SW17.2 | length 250.5
  Bottom Layer w10: SW17.2@4452.28,4030 4452.28,3969.76 4453.55,3968.49 D17.2@4453.55,3780
D18_2: D18.2 SW18.2 | length 250.5
  Bottom Layer w10: SW18.2@5202.28,4030 5202.28,3969.76 5203.55,3968.49 D18.2@5203.55,3780
D19_2: D19.2 SW19.2 | length 245.5
  Bottom Layer w10: SW19.2@5952.28,4030 5952.28,3969.76 5953.55,3968.49 D19.2@5953.55,3785
D20_2: D20.2 SW20.2 | length 245.5
  Bottom Layer w10: SW20.2@6702.28,4030 6702.28,3969.76 6703.55,3968.49 D20.2@6703.55,3785
D21_2: D21.2 SW21.2 | length 245.5
  Bottom Layer w10: SW21.2@7452.28,4030 7452.28,3969.76 7453.55,3968.49 D21.2@7453.55,3785
D22_2: D22.2 SW22.2 | length 245.5
  Bottom Layer w10: SW22.2@8197.28,4030 8197.28,3969.76 8198.55,3968.49 D22.2@8198.55,3785
D23_2: D23.2 SW23.2 | length 245.5
  Bottom Layer w10: SW23.2@8952.28,4030 8952.28,3969.76 8953.55,3968.49 D23.2@8953.55,3785
D24_2: D24.2 SW24.2 | length 245.5
  Bottom Layer w10: SW24.2@9702.28,4030 9702.28,3969.76 9703.55,3968.49 D24.2@9703.55,3785
D25_2: D25.2 SW25.2 | length 245.5
  Bottom Layer w10: SW25.2@10447.28,4030 10447.28,3969.76 10448.55,3968.49 D25.2@10448.55,3785
D26_2: D26.2 SW26.2 | length 245.5
  Bottom Layer w10: SW26.2@11197.28,4030 11197.28,3969.76 11198.55,3968.49 D26.2@11198.55,3785
D27_2: D27.2 SW27.2 | length 142.5
  Bottom Layer w10: SW27.2@11952.28,4030 11952.28,3969.76 11971.74,3969.76 11995.18,3946.32 D27.2@11995.18,3916.63
D28_2: D28.2 SW28.2 | length 142.5
  Bottom Layer w10: SW28.2@12892.28,4030 12892.28,3969.76 12911.74,3969.76 12935.18,3946.32 D28.2@12935.18,3916.63
D29_2: D29.2 SW29.2 | length 250.5
  Bottom Layer w10: SW29.2@2857.28,3280 2857.28,3219.76 2858.55,3218.49 D29.2@2858.55,3030
D30_2: D30.2 SW30.2 | length 250.5
  Bottom Layer w10: SW30.2@3887.28,3280 3887.28,3219.76 3888.55,3218.49 D30.2@3888.55,3030
D31_2: D31.2 SW31.2 | length 250.5
  Bottom Layer w10: SW31.2@4637.28,3280 4637.28,3219.76 4638.55,3218.49 D31.2@4638.55,3030
D32_2: D32.2 SW32.2 | length 250.5
  Bottom Layer w10: SW32.2@5387.28,3280 5387.28,3219.76 5388.55,3218.49 D32.2@5388.55,3030
D33_2: D33.2 SW33.2 | length 250.5
  Bottom Layer w10: SW33.2@6137.28,3280 6137.28,3219.76 6138.55,3218.49 D33.2@6138.55,3030
D34_2: D34.2 SW34.2 | length 250.5
  Bottom Layer w10: SW34.2@6887.28,3280 6887.28,3219.76 6888.55,3218.49 D34.2@6888.55,3030
D35_2: D35.2 SW35.2 | length 250.5
  Bottom Layer w10: SW35.2@7637.28,3280 7637.28,3219.76 7638.55,3218.49 D35.2@7638.55,3030
D36_2: D36.2 SW36.2 | length 252.6
  Bottom Layer w10: SW36.2@8387.28,3280 8387.28,3219.76 8393.55,3213.49 D36.2@8393.55,3030
D37_2: D37.2 SW37.2 | length 250.5
  Bottom Layer w10: SW37.2@9137.28,3280 9137.28,3219.76 9138.55,3218.49 D37.2@9138.55,3030